# Allegro board vcc12_5.brd
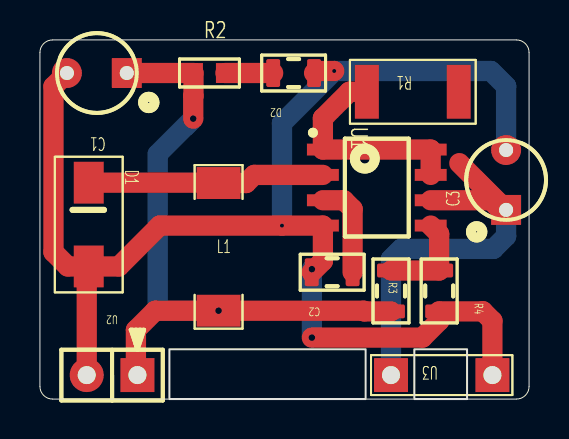
[diagram p0: board, top side]
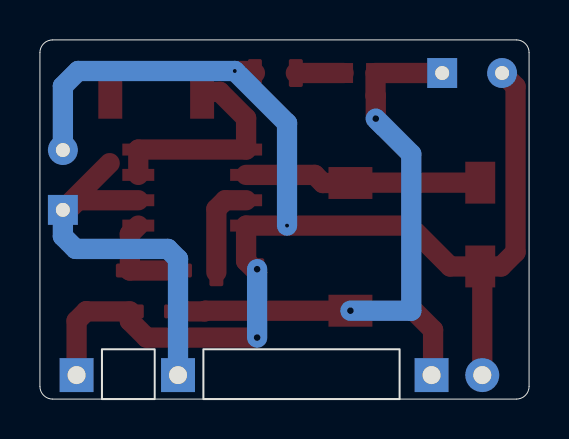
[diagram p1: board, bottom side, seen from below]

Outline 24.5 x 18 mm; copper layers: TOP, BOTTOM. Coordinates in mm from the lower left corner of the outline.
Outline path: rectangle 6.48,0 16.31,2.5 ; rectangle 18.75,0 21.39,2.5 ; 0,17.36 0,0.63 arc(0.19,0.19) 0.63,0 23.86,0 arc(24.31,0.19) 24.5,0.63 24.5,17.36 arc(24.31,17.81) 23.86,18 0.63,18 arc(0.19,17.81) 0,17.36

## Placement (name value [footprint] x y rotation side)
C1  470uf  [CAP_4MM]  2.85 16.34 180 top
C2  470pf  [STD0805]  14.64 6.36 180 top
C3  100uf  [CAP_4MM]  23.35 10.98 90 top
D1  1N5189  [CAPM5126X250N]  2.45 8.75 270 top
D2  RLED  [STD0805]  12.71 16.34 180 top
L1  220uh  [LM7575X450]  8.95 7.63 0 top
R1  0.33  [STD2010]  18.68 15.4 180 top
R2  10K  [STD0603]  8.49 16.34 0 top
R3  3.6K  [STD0805]  17.58 5.42 270 top
R4  1.2K  [STD0805]  20 5.42 270 top
U1  MC34063  [SOP8]  16.87 10.6 0 top
U2  2P  [ZCZ254-1X2]  4.88 1.2 180 top
U3  2P  [ZCZ508_2X1]  20.12 1.2 180 top

## Library data of the parts
C1 C3 = CAP POL
C2 = CAP NP: User Part Number: pn; Tolerance: RichardLC
D1 = 1N5467A
D2 = LED: User Part Number: pn; Tolerance: RichardLC
L1 = CHOKE
R1 R2 = R
R3 R4 = R: User Part Number: pn; Tolerance: RichardLC
U1 = MC34063
U2 = 2P: User Part Number: pn; Tolerance: RichardLC
U3 = 2P

## Footprints (pads in the part's own frame, mm; a bottom-side part is the same pattern mirrored in y, then rotated)
CAP_4MM
  rect 1.5x1.5 hole 0.7: 1(-1.5,0)
  round 1.5 hole 0.7: 2(1.5,0)
CAPM5126X250N
  rect 2.1x1.5 smd: 1(-2.1,0) 2(2.1,0)
LM7575X450
  rect 2.2x1.6 smd: 1(0,3.2) 2(0,-3.2)
SOP8
  rect 1.6x0.6 smd: 1(-2.7,1.905) 2(-2.7,0.635) 3(-2.7,-0.635) 4(-2.7,-1.905) 5(2.7,-1.905) 6(2.7,-0.635) 7(2.7,0.635) 8(2.7,1.905)
STD0603
  rect 0.95x1 smd: 1(-0.8,0) 2(0.8,0)
STD0805
  custom 0.7x1.4 smd: 1(-1.025,0) 2(1.025,0)
STD2010
  rect 1.2x2.7 smd: 1(-2.3,0) 2(2.3,0)
ZCZ254-1X2
  rect 1.7x1.7 hole 0.9: 1(0,0)
  round 1.7 hole 0.9: 2(2.54,0)
ZCZ508_2X1
  rect 1.7x1.7 hole 0.9: 1(-2.54,0) 2(2.54,0)

## Nets
GND: C1.2 C2.2 C3.2 D1.2(A) D2.1(CATHODE) R4.2 U1.4(GND) U2.2(OPEN) U3.1(COM)
N00640: R1.2 U1.1(SWITCH COLLECTOR) U1.7(SENSE) U1.8(DRIVER COLLECTOR)
N00705: C3.1 R1.1 U1.6(VCC) U3.2(OPEN)
N00829: C2.1 U1.3(TIMING CAPACITOR)
N00906: D1.1(C) L1.1 U1.2(SWITCH EMITTER)
N00954: C1.1 L1.2 R2.1 R3.2 U2.1(COM)
N00958: R3.1 R4.1 U1.5(INPUT)
N02429: D2.2(ANODE) R2.2

## Via types
v1: diameter 0.61, hole 0.33, TOP to BOTTOM, 4 vias
v2: diameter 0.45, hole 0.2, TOP to BOTTOM, 2 vias

## Routing (per net, layer and track width the routed paths; a pad name or vN(x,y) marks a point on that pad's centre or on a via; arc(x,y) is an arc through that point)
GND: length 70.5
  TOP w0.305: C2.2 13.61,6.01
  TOP w1.016: C2.2 14.17,6.92 U1.4 v2(12.12,8.7) 6,8.7 3.95,6.65 D1.2 ; v1(13.62,3.08) 19.16,3.08 20,3.92 R4.2 22.17,4.39 22.18,4.4 22.66,3.92 U3.1 ; D1.2 1.4,6.65 0.68,7.36 0.68,15.67 C1.2 ; D1.2 2.34,6.54 U2.2 ; D2.1 13.83,16.44 v2(14.74,16.44)
  BOTTOM w1.016: v2(12.12,8.7) 12.12,13.83 v2(14.74,16.44) 22.59,16.44 23.35,15.68 C3.2 ; v1(13.62,3.08) v1(13.62,6.51)
N00640: length 11
  TOP w1.016: R1.2 15.5,15.4 14.17,14.08 U1.1 U1.8 U1.7
N00705: length 20.7
  TOP w0.508: 20.98,11.85 21.01,11.82
  TOP w1.016: U1.6 22.59,9.97 23.07,9.48 C3.1 21.01,11.82
  BOTTOM w1.016: U3.2 17.58,7.02 18.09,7.53 22.71,7.53 23.35,8.16 C3.1
N00829: length 4.8
  TOP w1.016: C2.1 15.66,9.52 15.22,9.97 U1.3
N00906: length 11.9
  TOP w1.016: U1.2 10.73,11.24 10.33,10.83 L1.1 8.93,10.85 D1.1
N00954: length 34.5
  TOP w1.016: U2.1 4.81,1.28 4.81,3.46 5.77,4.43 v1(8.95,4.43) 16.21,4.43 16.25,4.39 R3.2 ; v1(7.68,14.05) 7.68,15.19 7.69,15.21 R2.1 C1.1
  BOTTOM w1.016: v1(8.95,4.43) 5.9,4.43 5.9,12.28 v1(7.68,14.05)
N00958: length 4.8
  TOP w1.016: R3.1 R4.1 20,8.27 U1.5
N02429: length 2.4
  TOP w1.016: R2.2 D2.2

## Text on the board
Ref Des/Assembly Top: - | +
PLACE_BOUND_TOP: FIGURE | SIZE | 7.87 | 13.0 | 27.56 | 35.43 | DRILL CHART: TOP to BOTTOM | ALL UNITS ARE IN MILS | PLATED | QTY | 2 | 4
